# Altium PCB GEX_IDC.PcbDoc
Units mil, origin at the board's own origin, x right, y up, seen from the top; angles counter-clockwise.
Board outline 2677.17 x 1929.14 mil, 2 copper layers (Top Layer, Bottom Layer); 28 components, 62 nets, 198 pads, 115 vias.
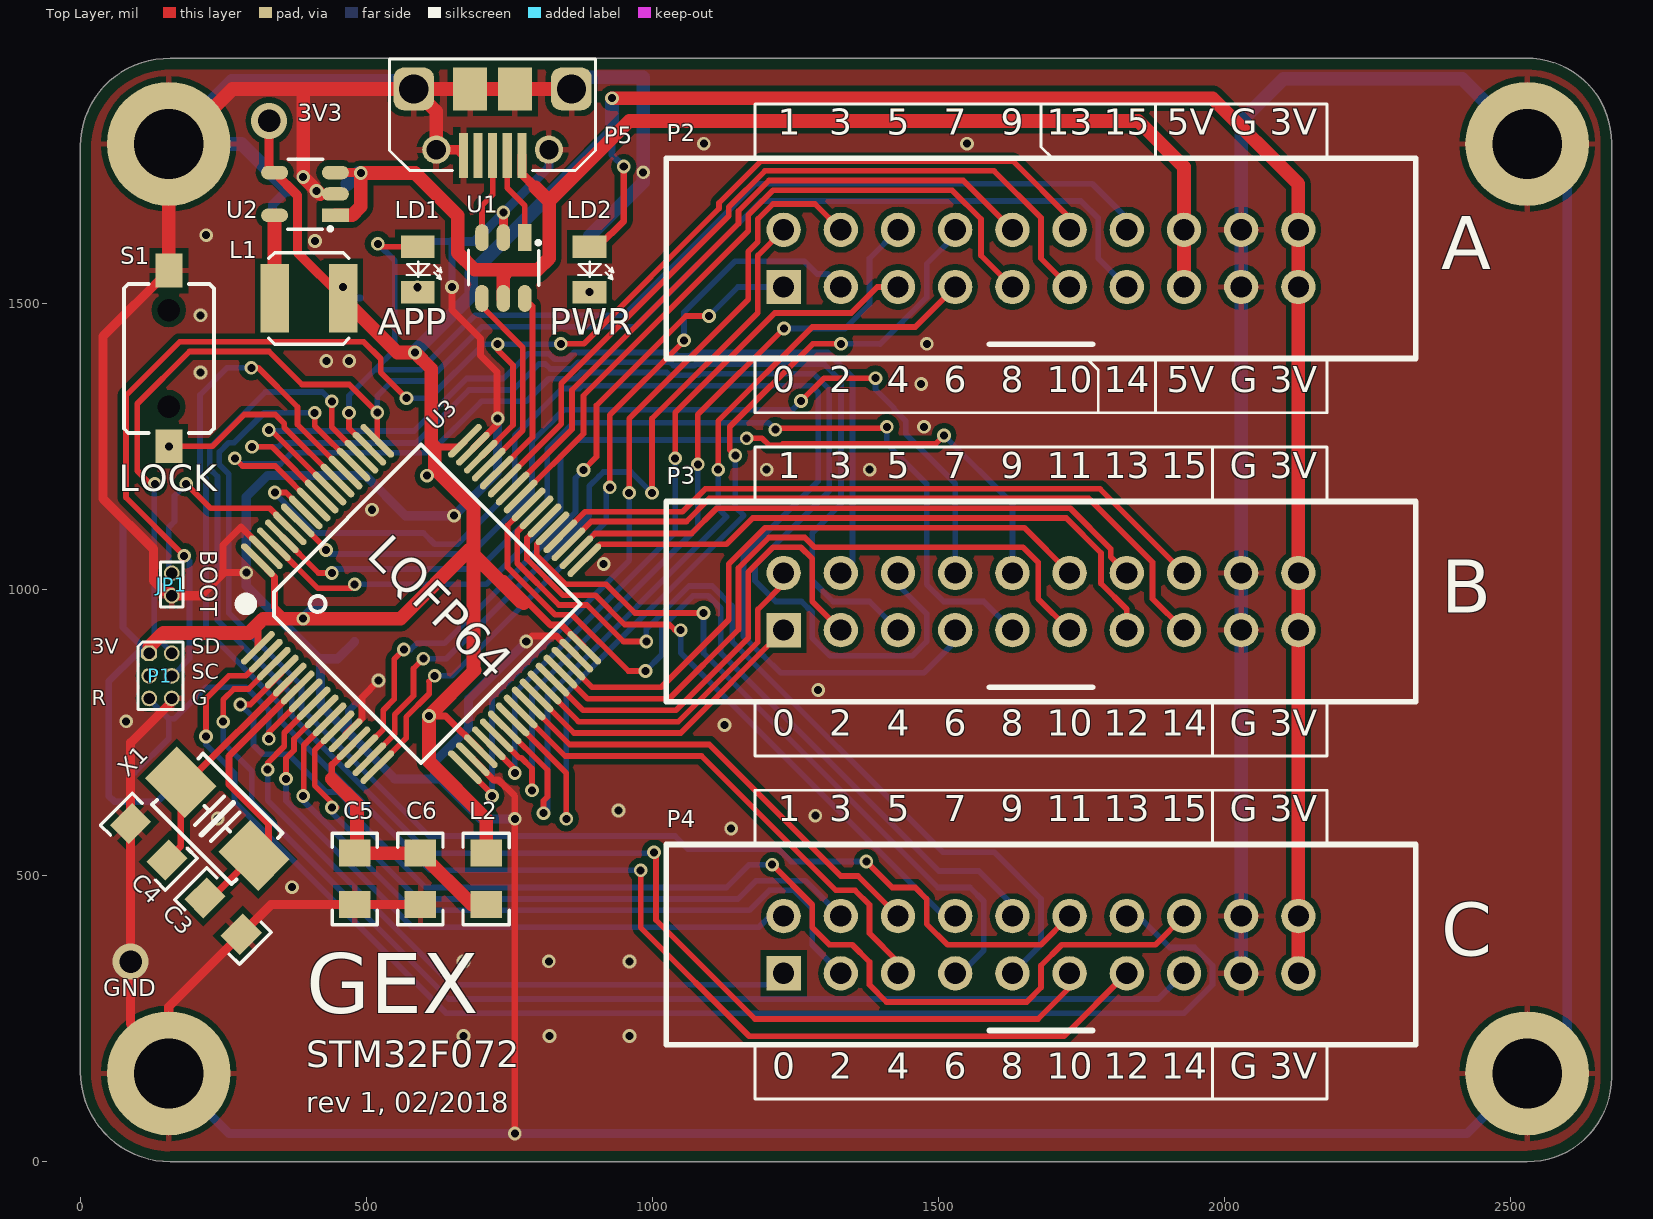
[diagram p0: Top Layer view]
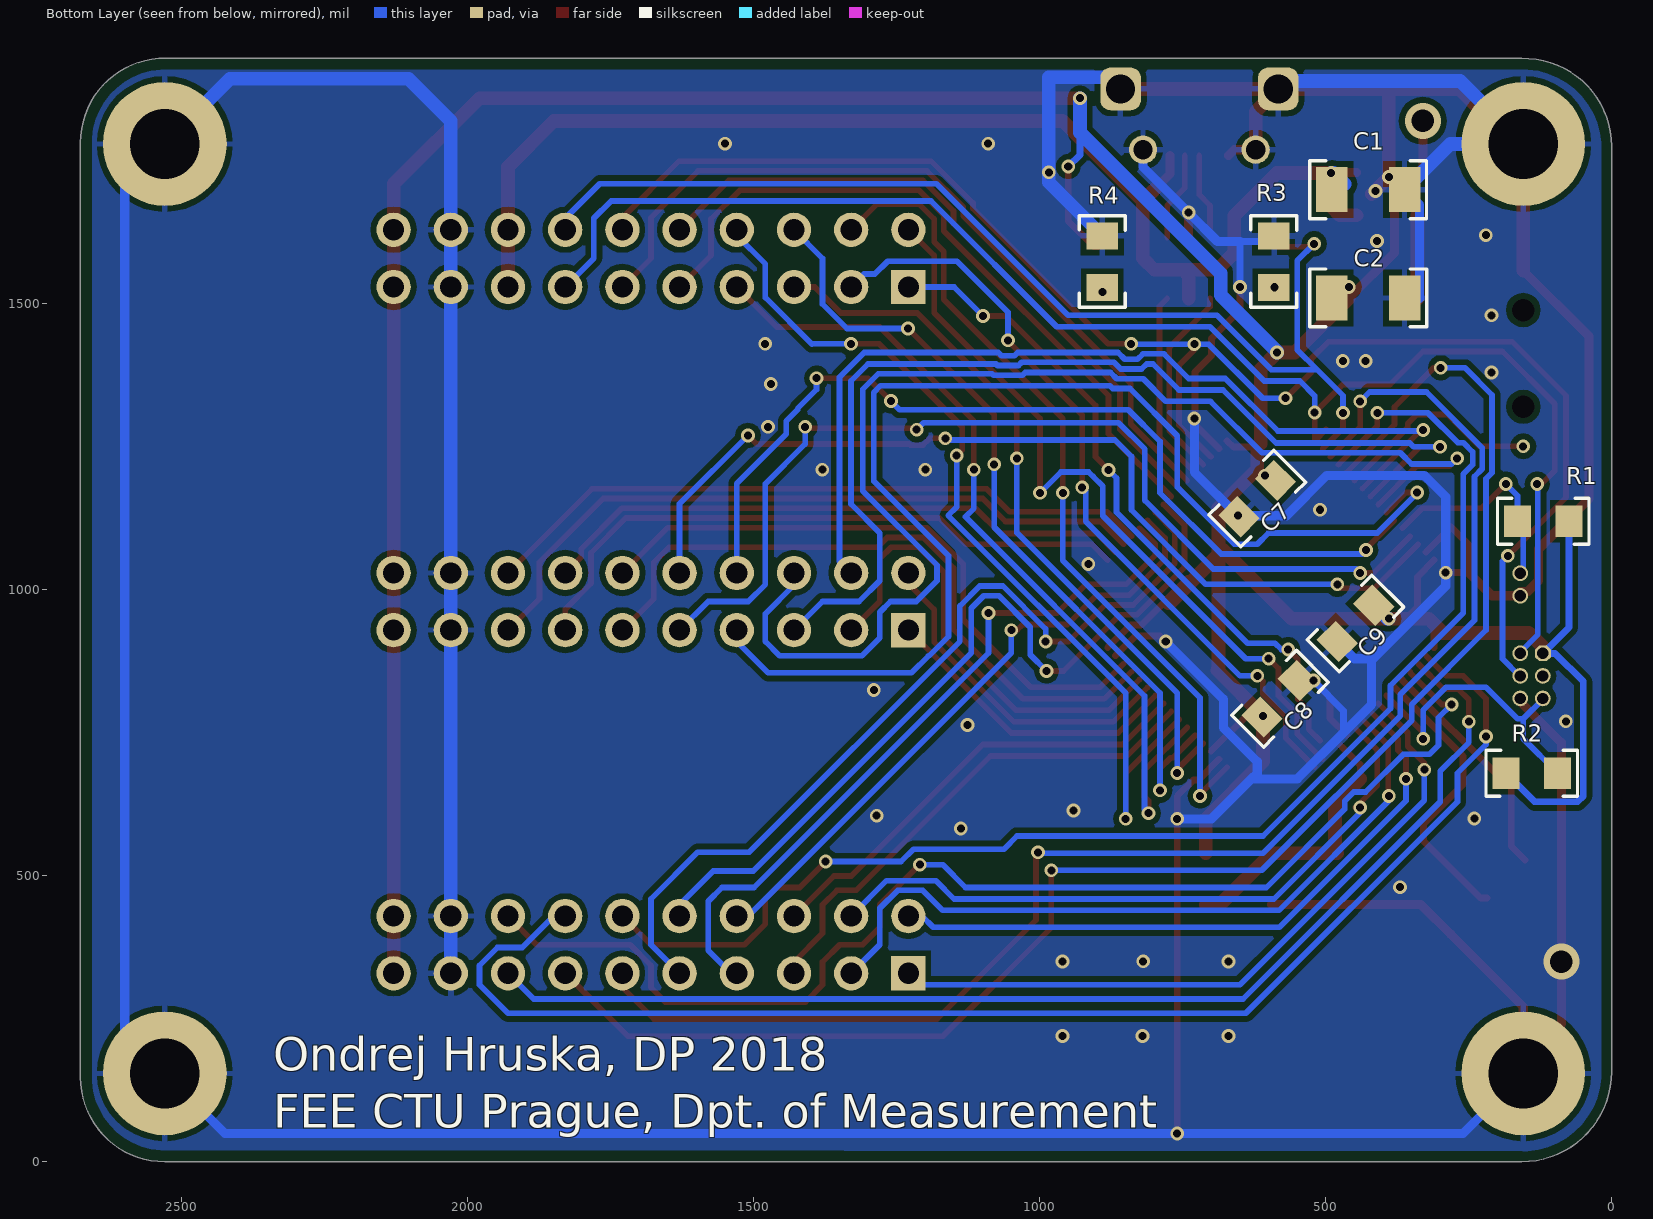
[diagram p1: Bottom Layer view, seen from below]

## Layer stack, top to bottom
Top Solder: solder mask 0.4, Solder Resist, Dk 3.5
Top Layer: signal copper 1.4
Dielectric 1: dielectric 12.6, FR-4, Dk 4.8
Bottom Layer: signal copper 1.4
Bottom Solder: solder mask 0.4, Solder Resist, Dk 3.5

## Board outline
0,1775.59 cw(c153.59,1775.59) 157.48,1929.13 2540.23,1929.14 cw(c2529.52,1781.89) 2677.16,1781.88 2677.17,147.64 cw(c2529.53,147.63) 2529.53,0 157.48,0 cw(c157.48,157.48) 0,157.48

## Design rules (kind name [scope] priority, off if disabled: settings)
Clearance [All] p1: gap=10 except(7: Track-Track Track-SMDPad SMDPad-SMDPad)
PolygonConnect PolygonConnect_GND [All vs InNet('GND') And IsVia] p1: connectstyle=Direct reliefconductorwidth=10 reliefentries=4 polygonreliefangle="90 Angle" airgapwidth=10
PolygonConnect [All] p2: connectstyle=Relief reliefconductorwidth=10 reliefentries=4 polygonreliefangle="90 Angle" airgapwidth=10
RoutingVias [All] p1: holewidth=14 width=24 viastyle="Through Hole" minholewidth=14 minwidth=24 maxholewidth=100 maxwidth=100
SolderMaskExpansion [All] p1: expansion=2
Width ThickSupply [(InNet('3V3') OR InNet('3V3A') OR InNet('5V'))] p1: maxlimit=40 minlimit=12 preferedwidth=40
Width [All] p2: maxlimit=100 minlimit=7 preferedwidth=10
30 further rules are at their usual default settings.

## Classes and differential pairs
component class GEX_Dongle: C1 C2 C3 C4 C5 C6 C7 C8 C9 L1 L2 LD1 P1 P2 P3 P4 P5 R1 R2 R3 S1 U1 U2 U3 X1

## Components (designator, comment, footprint, x,y, rotation, side; value= is the part's Value field where it differs from the comment)
C1 "4u7" C1206 425.78,1699.53 r0 bottom
C2 "4u7" C1206 425.72,1510.34 r0 bottom
C3 "12p" C0805 249.53,429.53 r135 top
C4 "12p" C0805 119.53,559.53 r315 top
C5 "1u" C0805 479.53,494.53 r90 top
C6 "100n" C0805 594.53,494.53 r90 top
C7 "100n" C0805 619.53,1159.53 r135 bottom
C8 "100n" C0805 579.53,809.53 r315 bottom
C9 "1u" C0805 447.71,941.35 r135 bottom
JP1 "BOOT" Header_2_1mm 159.53,1009.21 r270 top
L1 "4.7uH" L_3x3 399.53,1509.53 r0 top
L2 "BEAD" R0805 709.53,494.53 r270 top
LD1 "Red" LED_SMD 590,1560 r270 top
LD2 "Green" LED_SMD 890,1560 r270 top
P1 "PROG" Header_3x2_1mm 120.16,888.9 r0 top
P2 "Header 20" MLW20_GEX_14 1679.53,1579.53 r0 top locked
P3 "Header 20" MLW20_GEX_16 1679.53,979.53 r0 top locked
P4 "Header 20" MLW20_GEX_16 1679.53,379.53 r0 top locked
P5 "USB_Micro_TypeB_Molex_105017" USB_Micro-B_AFCI_10118194 720.71,1932.91 r180 top
R1 "100k" R0805 119.53,1119.53 r0 bottom
R2 "10k" R0805 139.53,679.53 r180 bottom
R3 "1k" R0805 590.5,1574 r270 bottom
R4 "1k" R0805 890.5,1574 r270 bottom
S1 "LOCK" BTN_AJ050 154.53,1404.53 r90 top
U1 "ESD" SOT23-6 776.93,1607.95 r270 top
U2 "MCP1603T-330I" SOT23-5 437.95,1654.72 r180 top
U3 "STM32F072RBT6" LQFP64 331.21,919.6 r45 top locked
X1 "8MHz" XTAL-SMD-50-32 239.53,599.53 r135 top

## Footprints (in the part's own frame and the unit in brackets; to place one, negate y for a bottom-side part, rotate by r counter-clockwise, add the part's x,y. Pads: shape width x height; smd on the part's side, far side on the other; paste and mask are expansions set on the pad)
BTN_AJ050 [mm]
  rect 1.5x1.2 smd: 1(-3.9,0) 2(3.9,0)
  rect 0x0 hole 1 unplated: ""(-2.15,0) ""(2.15,0)
  silkscreen extent -3.3,-2 3.3,2, body extent -3,-1.75 3,1.75, height 4
C0805 [mm]
  rect 1.2x1.4 smd: 1(-1.143,0) 2(1.143,0)
  silkscreen extent -2.03,-1 2.03,1, body extent -1,-0.63 1,0.63, height 0.5
C1206 [mm]
  rect 1.4x2 smd: 1(-1.619,0) 2(1.619,0)
  silkscreen extent -2.6,-1.28 2.6,1.28, body extent -1.6,-0.8 1.6,0.8, height 1
Header_2_1mm [mm]
  round 0.7 hole 0.5: 1(-0.5,0) 2(0.5,0)
  silkscreen extent -1,-0.5 1,0.5
Header_3x2_1mm [mm]
  oct 0.7x0.7 hole 0.5: 1(0,0)
  round 0.7 hole 0.5: 2(1,0) 3(0,-1) 4(1,-1) 5(0,-2) 6(1,-2)
  silkscreen extent -0.5,-2.5 1.5,0.5
L_3x3 [mil]
  rect 50x120 smd: 1(-60,0) 2(60,0)
  silkscreen extent -70,-80 70,80, body extent -60,-60 60,60, height 50
LED_SMD [mm]
  rect 1x1.5 smd: A(-1.016,0) C(1.016,0)
  silkscreen extent -0.36,-0.51 0.43,1.05, body extent -1.05,-0.45 1.02,0.45, height 0.85
LQFP64 [mm]
  oval 2x0.3 smd: 1(-0.75,0) 2(-0.75,-0.5) 3(-0.75,-1) 4(-0.75,-1.5) 5(-0.75,-2) 6(-0.75,-2.5) 7(-0.75,-3) 8(-0.75,-3.5) 9(-0.75,-4) 10(-0.75,-4.5) 11(-0.75,-5) 12(-0.75,-5.5) 13(-0.75,-6) 14(-0.75,-6.5) 15(-0.75,-7) 16(-0.75,-7.5) 33(12.25,-7.5) 34(12.25,-7) 35(12.25,-6.5) 36(12.25,-6) 37(12.25,-5.5) 38(12.25,-5) 39(12.25,-4.5) 40(12.25,-4) 41(12.25,-3.5) 42(12.25,-3) 43(12.25,-2.5) 44(12.25,-2) 45(12.25,-1.5) 46(12.25,-1) 47(12.25,-0.5) 48(12.25,0)
  oval 0.3x2 smd: 17(2,-10.25) 18(2.5,-10.25) 19(3,-10.25) 20(3.5,-10.25) 21(4,-10.25) 22(4.5,-10.25) 23(5,-10.25) 24(5.5,-10.25) 25(6,-10.25) 26(6.5,-10.25) 27(7,-10.25) 28(7.5,-10.25) 29(8,-10.25) 30(8.5,-10.25) 31(9,-10.25) 32(9.5,-10.25) 49(9.5,2.75) 50(9,2.75) 51(8.5,2.75) 52(8,2.75) 53(7.5,2.75) 54(7,2.75) 55(6.5,2.75) 56(6,2.75) 57(5.5,2.75) 58(5,2.75) 59(4.5,2.75) 60(4,2.75) 61(3.5,2.75) 62(3,2.75) 63(2.5,2.75) 64(2,2.75)
  silkscreen extent 0,-8.75 10.75,2, body extent 0.75,-8.75 10.75,1.25, height 1.6
MLW20_GEX_14 [mil] "Header, STRT 20WAY - MLW20"
  rect 60x60 hole 37: 1(-450,-50)
  round 60 hole 37: 2(-450,50) 3(-350,-50) 4(-350,50) 5(-250,-50) 6(-250,50) 7(-150,-50) 8(-150,50) 9(-50,-50) 10(-50,50) 11(50,-50) 12(50,50) 13(150,-50) 14(150,50) 15(250,-50) 16(250,50) 17(350,-50) 18(350,50) 19(450,-50) 20(450,50)
  silkscreen extent -655,-270 655,270
MLW20_GEX_16 [mil] "Header, STRT 20WAY - MLW20"
  rect 60x60 hole 37: 1(-450,-50)
  round 60 hole 37: 2(-450,50) 3(-350,-50) 4(-350,50) 5(-250,-50) 6(-250,50) 7(-150,-50) 8(-150,50) 9(-50,-50) 10(-50,50) 11(50,-50) 12(50,50) 13(150,-50) 14(150,50) 15(250,-50) 16(250,50) 17(350,-50) 18(350,50) 19(450,-50) 20(450,50)
  silkscreen extent -655,-270 655,270
R0805 [mm]
  rect 1.2x1.4 smd: 1(-1.143,0) 2(1.143,0)
  silkscreen extent -2.03,-1.03 2.03,1.02, body extent -1,-0.63 1,0.63, height 0.5
SOT23-5 [mm]
  rect 1.2x0.6 smd: 1(-0.2,0)
  oval 1.2x0.6 smd: 2(-0.2,-0.95) 3(-0.2,-1.9) 4(2.5,-1.9) 5(2.5,0)
  silkscreen extent -0.05,-2.5 1.92,0.67, body extent -0.24,-2.35 2.55,0.45, height 0.8
SOT23-6 [mm]
  rect 1.2x0.6 smd: 1(-0.2,0)
  oval 1.2x0.6 smd: 2(-0.2,-0.95) 3(-0.2,-1.9) 4(2.5,-1.9) 5(2.5,-0.95) 6(2.5,0)
  silkscreen extent -0.05,-2.5 1.92,0.68, body extent -0.24,-2.35 2.55,0.45, height 0.8
USB_Micro-B_AFCI_10118194 [mm]
  rect 0.4x2 smd: 1(-1.3,4.404) 2(-0.65,4.404) 3(0,4.404) 4(0.65,4.404) 5(1.3,4.404)
  rrect50% 1.8x1.9 hole 1.3: SH(-3.5,1.45) SH(3.5,1.45)
  round 1.25 hole 0.85: SH(-2.5,4.15) SH(2.5,4.15)
  rect 1.5x1.9 smd: SH(-1,1.45) SH(1,1.45)
  silkscreen extent -4.57,0.13 4.57,5.08, body extent -4.09,-1.17 4.11,4.26, height 2.73
XTAL-SMD-50-32 [mm]
  rect 2.5x2 smd: 1(-2.3,0) 2(2.3,0)
  silkscreen extent -2.5,-1.6 2.5,1.6, body extent -2.51,-1.6 2.51,1.6, height 1.2

## Part data
C1 C2 C3 C4 C5 C6 C7 C8 C9: library part C
JP1: library part JUMP
L1 L2: library part L, "Inductor"
LD1 LD2: library part LED
P1: library part "Header 3X2", "Header, 3-Pin, Dual row"
P2 P3 P4: "Header, 20-Pin"
P5: "Connector SMD USB Micro Type B bottom mount, (recommended if hand soldering)"
R1 R2 R3 R4: library part R
S1: library part SW-SPST, "Single-Pole, Single-Throw Switch"
U1: library part USBLC6_ESD
U2: library part MCP1603
X1: library part XTALL

## Free pads (board coordinates)
  round 216.54 hole 122.05 unplated paste+0: H1(154.53,1779.53) H2(2529.53,1779.53) H3(2529.53,154.53) H4(154.53,154.53)

## Via types
v1: diameter 24, hole 14, Top Layer to Bottom Layer, tented both sides, 112 vias
v2: diameter 62.99, hole 39.37, Top Layer to Bottom Layer, 2 vias
v3: diameter 24, hole 14, Top Layer to Bottom Layer, 1 vias

## Nets (pads, with @x,y where several pads share a name; then routed paths per layer and width w, separated by ;. In a path a pad name is that pad's centre, name@x,y a point inside that pad or via, vN(x,y) a via of type N, cw(c..) or ccw(c..) an arc to the next point about the centre after c; other vN are vias at no path point)
3V3: C2.2 C7.2 C8.2 C9.2 L1.2 L2.1 LD2.A P1.1 P2.19 P2.20 P3.19 P3.20 P4.19 P4.20 R1.1 R2.1 U2.4 U3.1 U3.19 U3.32 U3.48 U3.64 | length 7083.1
  Top Layer w12: U3.1 310.33,940.33 ; U3.64 339.53,1022.64 339.53,969.53 359.53,949.53 ; v1(609.53,779.53) 638.32,779.53 U3.19 ; 619.53,1249.53 661.14,1249.53 U3.48 ; 729.53,1019.53 741.28,1019.53 822.28,938.53 841.22,938.53 U3.32 ; LD2.A 905,1600 950,1645 v1(950,1740)
  Top Layer w16: v2(330,1820) 330,1739.06 U2.4 379.53,1689.53 379.53,1589.53 L1.2
  Top Layer w24: P1.1 120.16,900.13 144.71,924.68 294.68,924.68 310.33,940.33 319.53,949.53 359.53,949.53 v1(389.53,949.53) 559.53,949.53 679.53,1069.53 687.17,1061.89 ; L1.2 554.06,1415 v1(585,1415) 613.53,1386.47 613.53,1255.53 619.53,1249.53 619.53,1211.25 687.17,1143.61 687.17,1061.89 ; L2.1 709.53,599.53 609.53,699.53 v1(609.53,779.53) 689.53,859.53 687.17,861.89 687.17,1061.89 ; 775.28,977.04 771.16,981.16 769.53,979.53 729.53,1019.53 687.17,1061.89 ; v1(929.53,1859.53) 1979.53,1859.53 2129.53,1709.53 P2.20 P2.19 P3.20 P3.19 P4.20 P4.19
  Bottom Layer w12: R1.1 74.53,934.53 P1.1 98.9,888.9 49.53,839.53 49.53,639.53 59.53,629.53 134.53,629.53 R2.1 ; v1(459.53,1529.53) 478.71,1510.34 C2.2 ; 929.53,1799.53 929.53,1760.47 v1(950,1740)
  Bottom Layer w24: v1(389.53,949.53) 392.25,949.53 C9.2 ; v1(585,1415) 585,1416.92 683.53,1515.44 683.53,1553.53 929.53,1799.53 v1(929.53,1859.53)
  other v1: 605.89,1199.53
3V3A: C5.2 C6.2 L2.2 U3.13 | length 495.6
  Top Layer w12: 439.53,669.53 439.53,694.95 440.63,694.95 U3.13
  Top Layer w24: 439.53,669.53 483.53,625.53 483.53,543.53 C5.2 C6.2 684.53,449.53 L2.2
5V: C1.2 P2.15 P2.16 P5.1 U1.5 U2.1 U2.3 | length 2296.1
  Top Layer w16: U2.3 489.53,1729.53 v1(490.23,1728.83) ; P5.1 771.89,1727.17 795.71,1703.35
  Top Layer w24: U2.1 474.72,1654.72 490.23,1670.23 v1(490.23,1728.83) 585.17,1728.83 659.53,1654.47 659.53,1589.53 689.53,1559.53 749.53,1559.53 ; U1.5 739.53,1549.53 749.53,1559.53 ; 795.71,1703.35 819.53,1679.53 ; P2.15 P2.16 1929.53,1739.53 1849.53,1819.53 959.53,1819.53 819.53,1679.53 ; 749.53,1559.53 799.53,1559.53 819.53,1579.53 819.53,1679.53
  Bottom Layer w24: C1.2@467.03,1709.53 486.33,1728.83 v1(490.23,1728.83)
BOOT0: JP1.1 R1.2 U3.60 | length 388.7
  Top Layer w10: v1@180.39,1185 v1(185,1185) 227.47,1142.53 331,1142.53 U3.60
  Bottom Layer w10: JP1.1 154.34,1034.08 154.34,1109.34 R1.2 164.53,1164.53 v1(185,1185)
DM: U1.6 U3.44 | length 336.3
  Top Layer w10: U3.44@728.14,1204.73 790.53,1267.11 790.53,1495.93 U1.6
DP: U1.4 U3.45 | length 344.9
  Top Layer w10: U1.4 702.13,1495.11 773.53,1423.71 773.53,1278.4 U3.45
GND: C1.1 C2.1 C3.1 C4.1 C5.1 C6.1 C7.1 C8.1 C9.1 JP1.2 P1.6 P2.17 P2.18 P3.17 P3.18 P4.17 P4.18 P5.5 P5.SH pad.H1 pad.H2 pad.H3 pad.H4 R3.1 R4.1 S1.2 U1.2 U2.2 U3.12 U3.18 U3.31 U3.47 U3.63 | length 14850.7
  Top Layer w12: v1(290,1030) 249.53,1030 249.53,1078.57 280.48,1109.53 U3.63 ; U3.12 463.45,746.71 492.1,775.36 492.1,812.1 v1(521.35,841.35) ; v1(649.53,1529.53) 649.53,1489.53 699.53,1439.53 699.53,1409.53 728.53,1380.53 728.53,1300.53 v1(729.53,1299.53) 729.53,1289.53 686.71,1246.71 U3.47 ; U3.18 722.48,667.53 731.13,667.53 759.53,639.13 v1(759.53,599.53) v1(759.53,49.53) ; v1(779.53,909.53) 789.53,919.53 832.38,919.53 U3.31
  Top Layer w16: pad.H4 pad.H4@154.53,174.53 ; S1.2 39.53,1443.07 39.53,1159.53 127.75,1071.31 127.75,1015.73 146.36,997.12 159.53,997.12 JP1.2 209.06,989.53 249.53,1030 ; P1.6 159.53,804.58 87.71,732.76 C4.1 v2(87.71,350) 87.71,241.35 pad.H4@154.53,174.53 ; C6.1 C5.1 333.17,449.53 C3.1 154.53,270.89 pad.H4@154.53,174.53 ; P5.SH@622.28,1769.53 659.53,1769.53 P5.5 ; U1.2 v1(739.53,1659.53)
  Top Layer w24: S1.2 pad.H1 169.53,1779.53 265.83,1875.83 389.53,1875.83 ; v1@419.36,1692.13 v1(389.53,1721.95) 389.53,1875.83 ; P5.SH@622.28,1769.53 622.28,1836.46 P5.SH@582.91,1875.83 ; P5.SH@858.5,1875.83 760.08,1875.83 681.34,1875.83 P5.SH@582.91,1875.83 ; 389.53,1875.83 P5.SH@582.91,1875.83
  Bottom Layer w12: 468.45,750.61 468.45,788.45 v1(521.35,841.35) ; R3.1@589.03,1609.03 649.53,1609.03 v1(649.53,1529.53)
  Bottom Layer w16: pad.H4 259.53,49.53 v1(759.53,49.53) 2424.53,49.53 pad.H3 2599.53,224.53 2599.53,1709.53 pad.H2 ; C2.1@335.78,1509.53 335.78,1673.28 C1.1 ; C9.1 449.53,879.53 419.53,879.53 ; 649.53,1609.03 689.03,1609.03 v1(739.53,1659.53) 819.13,1739.13 P5.SH@819.13,1769.53 ; v1(729.53,1299.53) 729.53,1205.89 v1(653.17,1129.53) 568.46,1129.53 497.99,1200 327.57,1200 290,1162.43 v1(290,1030) 290,1006.63 417.1,879.53 419.53,879.53 ; v1(759.53,599.53) 699.53,599.53 629.53,669.53 ; v1(779.53,909.53) 678.79,808.79 678.79,758.79 619.53,699.53 619.53,679.53 629.53,669.53 ; 419.53,879.53 419.53,799.53 468.45,750.61 549.53,669.53 629.53,669.53
  Bottom Layer w24: C1.1 282.03,1779.53 pad.H1 264.53,1889.53 569.21,1889.53 P5.SH@582.91,1875.83 ; P5.SH@858.5,1875.83 878.68,1896 984,1896 v1(984,1730) 984,1712.5 R4.1 ; P4.17 P4.18 P3.17 P3.18 P2.17 P2.18 2029.53,1819.53 2103.53,1893.53 2415.53,1893.53 pad.H2
  other v1: 670,220 820,220 960,220 670,350 960,350 818.9,350.39 370,480 1137.8,582.68 240,600 1285,605 940.94,614.17 1125.98,763.78 80,770 1290,825 915,1045 510,1140 1200,1210 1380,1210 1475,1285 1470,1360 210,1380 430,1400 470,1400 1480,1430 210,1480 410,1610 220,1620 412.77,1697.13 1090,1780 1550,1780
LED: LD1.A P2.14 U3.50 | length 1984.7
  Top Layer w10: v1(469.53,1309.53) 469.53,1282.38 U3.50 ; v1(520,1605) 525,1600 LD1.A
  Bottom Layer w10: v1(469.53,1309.53) 469.53,1339.53 515,1385 ; v1(520,1605) 549.47,1575.53 549.47,1419.47 515,1385 ; P2.14 1829.53,1649.53 1769.06,1710 1180.47,1710 950.47,1480 690,1480 595,1385 515,1385
LOCK: S1.1 U3.54 | length 369.8
  Top Layer w10: v1(154.53,1250.98) 230.98,1250.98 286.53,1306.53 340.71,1306.53 356.53,1290.71 356.53,1284.03 U3.54
NetL1_1: L1.1 U2.5 | length 145.2
  Top Layer w24: L1.1 U2.5
NetLD1_C: LD1.C R3.2 | length 10
  Bottom Layer w10: R3.2@589.03,1519.03 v1(589.03,1529.03)
NetLD2_C: LD2.C R4.2 | length 9.2
  Top Layer w12: LD2.C v3(890.5,1520.5)
  Bottom Layer w12: v3(890.5,1520.5) R4.2
NetP5_2: P5.2 U1.1 | length 156.4
  Top Layer w10: P5.2 746.3,1702.76 776.93,1672.13 U1.1
NetP5_3: P5.3 U1.3 | length 151.4
  Top Layer w10: U1.3 702.13,1672.13 720.71,1690.71 P5.3
NRST: P1.5 R2.2 U3.7 | length 536.4
  Top Layer w10: v1(329.53,739.53) 329.53,750.88 U3.7
  Bottom Layer w10: R2.2 154.53,739.53 154.53,774.46 ; P1.5 120.16,808.83 154.53,774.46 ; v1(329.53,739.53) 329.53,789.53 289.53,829.53 219.6,829.53 164.53,774.46 154.53,774.46
OSC_IN: C4.2 U3.5 X1.2 | length 411.3
  Top Layer w12: C4.2 175.5,551.86 X1.2 187.09,663.56 366.29,842.76 U3.5
OSC_OUT: C3.2 U3.6 X1.1 | length 499.2
  Top Layer w12: C3.2 229.41,461.35 X1.1 328.56,560.5 328.56,590.5 259.53,659.53 259.53,709.13 379.53,829.12 U3.6
PA0: P2.1 U3.14 | length 1197.2
  Top Layer w10: U3.14@509.53,736.01 529.53,756.01 529.53,789.53 548.53,808.53 548.53,878.53 v1(565.53,895.53) ; v1(879.53,1209.53) 902.53,1232.53 902.53,1322.53 1058.92,1478.92 v1(1098.92,1478.92)
  Bottom Layer w10: v1(565.53,895.53) 577.34,895.53 588.34,906.53 636.53,906.53 865.53,1135.53 865.53,1195.53 v1(879.53,1209.53) ; v1(1098.92,1478.92) 1149.53,1529.53 P2.1
PA1: P2.2 U3.15 | length 1350.8
  Top Layer w10: U3.15 549.53,748.17 549.53,781.75 582.53,814.75 582.53,862.53 v1(599.53,879.53) ; v1(999.53,1169.53) 999.53,1299.53 1184.53,1484.53 1184.53,1584.53 P2.2
  Bottom Layer w10: v1(599.53,879.53) 639.53,879.53 889.53,1129.53 889.53,1181.34 906.53,1198.34 914.34,1206.16 962.89,1206.16 v1(999.53,1169.53)
PA2: P2.3 U3.16 | length 1371.4
  Top Layer w10: U3.16 569.53,740.33 569.53,777.71 609.96,818.14 609.96,839.1 609.53,839.53 v1(619.53,849.53) ; v1@919.53,1179.53 919.89,1179.16 v1(925.53,1179.16) 925.53,1305.53 1055.29,1435.29 v1(1055.29,1436.28)
  Bottom Layer w10: v1(619.53,849.53) 649.53,849.53 919.53,1119.53 919.53,1173.16 v1(925.53,1179.16) ; v1(1055.29,1436.28) 1055.29,1485.29 1144.53,1574.53 1265.74,1574.53 1288.24,1552.03 1307.03,1552.03 P2.3
PA3: P2.4 U3.17 | length 1445.8
  Top Layer w10: U3.17 719.53,642.64 v1(719.53,639.53) ; v1(959.53,1169.53) 959.53,1299.53 1167.53,1507.53 1167.53,1591.57 1184.53,1608.57 1184.53,1648.17 1210.89,1674.53 1284.53,1674.53 P2.4
  Bottom Layer w10: v1(719.53,639.53) 719.53,811.34 959.53,1051.34 v1(959.53,1169.53)
PA4: P2.5 U3.20 | length 1298.1
  Top Layer w10: U3.20 759.53,686.16 v1(759.53,679.53) ; v1(1040,1230) 1040,1310 1214,1484 1347.64,1484 1393.17,1529.53 P2.5
  Bottom Layer w10: v1(759.53,679.53) 759.53,819.53 1040,1100 v1(1040,1230)
PA5: P2.6 U3.21 | length 1431.6
  Top Layer w10: U3.21 767,706.53 770.71,706.53 789.53,687.71 v1(789.53,649.53) ; v1(1079.53,1219.53) 1079.53,1306.53 v1(1230,1457)
  Bottom Layer w10: v1(789.53,649.53) 789.53,819.53 1079.53,1109.53 v1(1079.53,1219.53) ; v1(1230,1457) 1337,1457 1379.53,1499.53 1379.53,1579.53 P2.6
PA6: P2.7 U3.22 | length 1519.5
  Top Layer w10: U3.22 816.53,684.84 816.53,638.34 809.53,631.34 v1(809.53,609.53) ; v1(1115,1210) 1115,1295 1279.53,1459.53 1459.53,1459.53 P2.7
  Bottom Layer w10: v1(809.53,609.53) 816.53,616.53 816.53,814.61 1129.53,1127.61 1115,1142.14 v1(1115,1210)
PA7: P2.8 U3.23 | length 1614.4
  Top Layer w10: U3.23 849.53,679.67 v1(849.53,599.53) ; v1(1145,1235) 1135.47,1244.53 1135.47,1285 1280.47,1430 v1(1330,1430)
  Bottom Layer w10: v1(849.53,599.53) 849.53,819.53 1160,1130 1145,1145 v1(1145,1235) ; v1(1330,1430) 1397.69,1430 1398.17,1429.53 1479.53,1510.89 1479.53,1569.53 1529.53,1619.53 P2.8
PA8: P2.9 U3.41 | length 1244
  Top Layer w10: U3.41 879.53,1273.04 879.53,1339.53 1167.53,1627.53 1167.53,1655.21 1210.85,1698.53 1524.17,1698.53 1574.53,1648.17 1574.53,1584.53 P2.9
PA9: P2.10 U3.42 | length 1185.4
  Top Layer w10: U3.42 859.53,1280.88 859.53,1349.53 1150.53,1640.53 1150.53,1662.25 1203.8,1715.53 1543.53,1715.53 P2.10
PA10: P2.11 U3.43 | length 1388.3
  Top Layer w10: U3.43 840.71,1289.91 840.71,1360.71 1133.53,1653.53 1133.53,1669.29 1196.76,1732.53 1597.47,1732.53 1679.53,1650.47 1679.53,1579.53 P2.11
PA13: P1.4 P2.12 U3.46 | length 2765
  Top Layer w10: v1(181.34,1059.53) 79.53,1161.34 79.53,1339.53 173.53,1433.53 495.53,1433.53 525,1404.06 525,1380 v1(570,1335) ; U3.46 700.97,1232.79 756.53,1288.34 756.53,1392.53 729.53,1419.53 v1(729.53,1429.53) ; v1(840,1430) 880,1430 1116.53,1666.53 1116.53,1676.33 1189.72,1749.53 1630.47,1749.53 1729.53,1650.47 P2.12
  Bottom Layer w10: P1.4 160.86,849.53 190.86,879.53 190.86,1050.01 v1(181.34,1059.53) ; v1(570,1335) 610,1335 704.53,1429.53 v1(729.53,1429.53) 839.53,1429.53 v1(840,1430)
PA14: P1.2 P2.13 U3.49 | length 2629.2
  Top Layer w10: v1(130,1185) 122.81,1185 99.53,1208.28 99.53,1325.49 190.57,1416.53 330,1416.53 387.47,1359.06 470,1359.06 v1(519.12,1309.93) U3.49 U3.49@499.53,1280.22
  Bottom Layer w10: v1(130,1185) 128.91,1183.91 128.91,922.03 159.53,891.41 P1.2 ; v1(519.12,1309.93) 519.12,1339.12 545,1365 607.23,1365 702.23,1460 970,1460 1190,1680 1749.06,1680 1779.53,1649.53 1779.53,1579.53 P2.13
PB0: P3.1 U3.26 | length 533.8
  Top Layer w10: U3.26 863.19,749.53 1049.53,749.53 P3.1
PB1: P3.2 U3.27 | length 595
  Top Layer w10: U3.27 871.03,769.53 1045.49,769.53 1184.53,908.57 1184.53,965.74 1229.53,1010.74 P3.2
PB2: P3.3 U3.28 | length 816.1
  Top Layer w10: U3.28 878.87,789.53 1041.44,789.53 1167.53,915.61 1167.53,1031.17 1210.89,1074.53 1259.53,1074.53 1279.53,1054.53 1279.53,979.53 P3.3
PB3: P3.4 U3.55 | length 1609.2
  Top Layer w10: v1(329.53,1279.53) 333.19,1279.53 U3.55
  Bottom Layer w10: v1(329.53,1279.53) 329.53,1277.55 583.51,1277.55 675.49,1369.53 739.53,1369.53 782.53,1412.53 819.29,1412.53 828.82,1403 851.18,1403 863.18,1415 1038.39,1415 1044.11,1409.28 1066.48,1409.28 1072.2,1415 1306.82,1415 1350,1371.82 1350,1050 P3.4
PB4: P3.5 U3.56 | length 1829.4
  Top Layer w10: v1(300,1250) 334.88,1250 U3.56
  Bottom Layer w10: v1(300,1250) 300,1249.08 300.92,1250 346.47,1250 353.01,1256.54 586.54,1256.54 679.53,1349.53 756.53,1349.53 802,1395 812.77,1395 821.77,1386 858.23,1386 870.23,1398 1031.35,1398 1037.07,1392.28 1073.52,1392.28 1076.24,1395 1300,1395 1330,1365 1330,1150 1279.53,1099.53 1279.53,1015.89 1315.89,979.53 1379.53,979.53 P3.5
PB5: P3.6 U3.57 | length 2215.8
  Top Layer w10: v1(270,1230) 283.47,1216.53 340.51,1216.53 U3.57
  Bottom Layer w10: v1(270,1230) 280,1220 350,1220 369.54,1239.54 611.35,1239.54 701.34,1329.53 779.53,1329.53 819,1369 865.27,1369 876.27,1380 1025.3,1380 1030.03,1375.28 1080.56,1375.28 1083.28,1378 1282,1378 1309.53,1350.47 1309.53,1173.17 1179.53,1043.17 1179.53,1015.89 1215.89,979.53 1260.74,979.53 1279.53,960.74 1279.53,915.89 1310.89,884.53 1454.53,884.53 1479.53,909.53 1479.53,958.17 1429.53,1008.17 P3.6
PB6: P3.7 U3.58 | length 2149.7
  Top Layer w10: v1(340,1170) 359.2,1170 U3.58
  Bottom Layer w10: v1(340,1170) 339.06,1170 409.73,1099.33 599.73,1099.33 619.54,1079.52 659.52,1079.52 759.53,1179.53 759.53,1269.53 842,1352 872.31,1352 877.31,1357 1278,1357 1290,1345 1290,1190 1159.53,1059.53 1159.53,918.31 1193.31,884.53 1194.53,884.53 1224.06,855 1475,855 1529.53,909.53 P3.7
PB7: P3.8 U3.59 | length 1614.2
  Top Layer w10: U3.59 429.53,1071.84 v1(429.53,1069.53) ; v1(1260,1330) 1300,1370 v1(1390,1370)
  Bottom Layer w10: v1(429.53,1069.53) 436.54,1062.52 682.52,1062.52 789.53,1169.53 789.53,1259.53 845,1315 1245,1315 v1(1260,1330) ; v1(1390,1370) 1390,1350 1423.18,1316.82 1423.18,1315 1443,1295.18 1443,1272.42 1529.53,1185.89 P3.8
PB8: P3.9 U3.61 | length 1740.3
  Top Layer w10: U3.61 416.16,1029.53 v1(439.53,1029.53) ; v1(1215,1280) 1217.53,1282.53 1407.53,1282.53 v1(1410,1285)
  Bottom Layer w10: v1(439.53,1029.53) 446.53,1036.53 696.53,1036.53 816.01,1156.01 816.01,1246.01 862,1292 1203,1292 v1(1215,1280) ; v1(1410,1285) 1410,1255 1479.53,1185.47 1479.53,1009.53 1509.53,979.53 1579.53,979.53 P3.9
PB9: P3.10 U3.62 | length 1672.7
  Top Layer w10: U3.62 415.32,1002.53 472.53,1002.53 v1(479.53,1009.53) ; v1(1165,1265) 1191.82,1265 1203.82,1253 1226.18,1253 1228.18,1255 1495,1255 v1(1510,1270)
  Bottom Layer w10: v1(479.53,1009.53) 709.53,1009.53 839.53,1139.53 839.53,1233.04 868.48,1262 1166.18,1262 1165,1263.18 v1(1165,1265) ; v1(1510,1270) 1629.53,1150.47 P3.10
PB10: P3.11 U3.29 | length 1194.2
  Top Layer w10: U3.29 886.71,809.53 1029.53,809.53 1150.53,930.53 1150.53,1038.21 1203.85,1091.53 1266.57,1091.53 1283.57,1074.53 1648.17,1074.53 1674.53,1048.17 1674.53,984.53 P3.11
PB11: P3.12 U3.30 | length 1099
  Top Layer w10: U3.30 894.55,829.53 1015.49,829.53 1133.53,947.57 1133.53,1045.25 1196.8,1108.53 1650.53,1108.53 P3.12
PB12: P3.13 U3.33 | length 1112.9
  Top Layer w10: U3.33 908.72,1079.53 1129.53,1079.53 1175.53,1125.53 1723.53,1125.53 1784.53,1064.53 1784.53,1010.89 1829.53,965.89 P3.13
PB13: P3.14 U3.34 | length 1049.2
  Top Layer w10: U3.34 899.88,1098.53 1068.53,1098.53 1112.53,1142.53 1730.57,1142.53 1801.53,1071.57 1801.53,1057.53 P3.14
PB14: P3.15 U3.35 | length 1242
  Top Layer w10: U3.35 893.04,1119.53 1059.53,1119.53 1099.53,1159.53 1763.17,1159.53 1874.53,1048.17 1874.53,984.53 P3.15
PB15: P3.16 U3.36 | length 1185.5
  Top Layer w10: U3.36 882.21,1136.53 1052.49,1136.53 1092.49,1176.53 1782.53,1176.53 P3.16
PC0: P4.1 U3.8 | length 1246.7
  Top Layer w10: v1(327.44,685.53) 327.44,697.44 356.53,726.53 356.53,750.04 U3.8
  Bottom Layer w10: v1(327.44,685.53) 327.44,631.61 649.53,309.53 1209.53,309.53 P4.1
PC1: P4.2 U3.9 | length 1151.5
  Top Layer w10: v1(359.53,669.53) 359.53,705.49 373.53,719.49 373.53,739.21 U3.9
  Bottom Layer w10: v1(359.53,669.53) 359.53,631.34 580.87,410 1185.96,410 1205.49,429.53 P4.2
PC2: P4.3 U3.10 | length 1292.5
  Top Layer w10: v1(389.53,639.53) 390.53,640.53 390.53,728.37 U3.10
  Bottom Layer w10: v1(389.53,639.53) 389.53,631.34 581.34,439.53 1169.53,439.53 1204.53,474.53 1248.17,474.53 1279.53,443.17 1279.53,379.53 P4.3
PC3: P4.4 U3.11 | length 1181.1
  Top Layer w10: v1(439.53,619.53) 447.71,619.53 409.53,657.71 409.53,719.53 U3.11
  Bottom Layer w10: v1(439.53,619.53) 439.53,610.47 590.47,459.53 1149.53,459.53 1181.53,491.53 1267.53,491.53 P4.4
PC4: P4.5 U3.24 | length 890.5
  Top Layer w10: U3.24 847.51,709.53 1085.89,709.53 1320.89,474.53 1354.53,474.53 1379.53,449.53 1379.53,399.53 1429.53,349.53 P4.5
PC5: P4.6 U3.25 | length 799.9
  Top Layer w10: U3.25 855.35,729.53 1099.53,729.53 1329.53,499.53 1359.53,499.53 P4.6
PC6: P4.7 U3.37 | length 1284.3
  Top Layer w10: U3.37 797.7,1079.86 797.7,1060.69 848.86,1009.53 919.53,1009.53 969.53,959.53 v1(1089.53,959.53)
  Bottom Layer w10: v1(1089.53,959.53) 1089.53,889.53 1499.53,479.53 1555.49,479.53 1579.53,455.49 1579.53,369.53 1539.53,329.53 P4.7
PC7: P4.8 U3.38 | length 1111.3
  Top Layer w10: U3.38 780.7,1090.7 780.7,1053.65 843.82,990.53 900.53,990.53 951.53,939.53 1029.53,939.53 1039.53,929.53 v1(1049.53,929.53)
  Bottom Layer w10: v1(1049.53,929.53) 1049.53,889.53 1509.53,429.53 P4.8
PC8: P4.9 U3.39 | length 1542.3
  Top Layer w10: U3.39 763.7,1101.54 763.7,1046.61 836.78,973.53 885.53,973.53 949.53,909.53 v1(989.53,909.53)
  Bottom Layer w10: v1(989.53,909.53) 989.53,931.75 1064.3,1006.53 1104.75,1006.53 1139.53,971.75 1139.53,909.53 1507.71,541.35 1597.71,541.35 1679.53,459.53 1679.53,379.53 P4.9
PC9: P4.10 U3.40 | length 1455.2
  Top Layer w10: U3.40 746.7,1112.38 746.7,1039.56 829.74,956.53 859.53,956.53 958.06,858 v1(988,858)
  Bottom Layer w10: v1(988,858) 1016.53,886.53 1016.53,934.71 1071.34,989.53 1097.71,989.53 1119.53,967.71 1119.53,889.53 1500.71,508.35 1570.71,508.35 1629.53,449.53 P4.10
PC10: P4.11 U3.51 | length 2611.4
  Top Layer w10: v1(439.53,1329.53) 439.53,1284.55 U3.51 ; v1(1003,541) 1006.53,537.47 1006.53,422.53 1179.53,249.53 1674.53,249.53 1729.53,304.53 P4.11
  Bottom Layer w10: v1(439.53,1329.53) 423.07,1345.98 323.76,1345.98 226,1248.23 226,1211.77 239.53,1198.25 239.53,946.82 369.53,816.82 369.53,779.53 609.53,539.53 997.71,539.53 1003,534.24 v1(1003,541)
PC11: P4.12 U3.52 | length 2382.2
  Top Layer w10: v1(409.53,1309.53) 409.53,1286.71 U3.52 ; v1(1374.06,525) 1419.53,479.53 1459.53,479.53 1479.53,459.53 1479.53,415.89 1515.89,379.53 1679.53,379.53 P4.12
  Bottom Layer w10: v1(409.53,1309.53) 321.75,1309.53 321.55,1309.73 268.82,1257 258.82,1257 243,1241.18 243,1218.82 259.53,1202.29 259.53,959.53 386.53,832.53 386.53,792.53 609.53,569.53 1039.53,569.53 1062.53,546.53 1220.71,546.53 1242.24,525 v1(1374.06,525)
PC12: P4.13 U3.53 | length 2808
  Top Layer w10: v1(298.8,1388.11) 310.94,1388.11 379.53,1319.53 379.53,1288.87 U3.53 ; v1(979.53,509.53) 979.53,409.53 1169.53,219.53 1719.53,219.53 P4.13
  Bottom Layer w10: v1(298.8,1388.11) 256.3,1388.11 209,1340.82 209,1204.73 219.53,1194.21 219.53,929.53 349.53,799.53 349.53,771.75 611.75,509.53 v1(979.53,509.53)
PC13: P4.14 U3.2 | length 2440.1
  Top Layer w10: v1(219.64,743.5) 219.64,809.42 219.53,809.53 259.53,849.53 288.98,849.53 U3.2
  Bottom Layer w10: v1(219.64,743.5) 219.64,729.64 219.53,729.53 269.53,679.53 269.53,629.53 639.53,259.53 1929.53,259.53 1979.53,309.53 1979.53,343.17 1948.17,374.53 1904.53,374.53 1849.53,429.53 P4.14
PC14: P4.15 U3.3 | length 2105.2
  Top Layer w10: v1(249.53,769.53) 249.53,807.71 268.34,826.53 293.82,826.53 U3.3
  Bottom Layer w10: v1(249.53,769.53) 249.53,733.06 299.53,683.06 299.53,629.53 644.53,284.53 1884.53,284.53 P4.15
PC15: P4.16 U3.4 | length 2164.4
  Top Layer w10: v1(279.53,799.53) 297.04,799.53 352.09,854.58 U3.4 ; v1(1209.53,519.53) 1279.53,449.53 1279.53,409.53 1309.53,379.53 1349.53,379.53 1379.53,349.53 1379.53,309.53 1409.53,279.53 1654.53,279.53 1679.53,304.53 1679.53,343.17 1715.89,379.53 1879.53,379.53 P4.16
  Bottom Layer w10: v1(279.53,799.53) 302.53,776.53 302.53,728.34 318.34,712.53 364.03,712.53 430.03,646.53 450.71,646.53 466.53,630.71 466.53,616.57 603.57,479.53 1129.53,479.53 1169.53,519.53 v1(1209.53,519.53)
pads on no net: P1.3 P5.4 S1.

## Polygon pours and split planes (outlines as drawn)
GND on Top Layer "GND_TOP" (solid, remove dead copper, pour order 0): 19.34,1772.51 19.34,169.4 19.37,155.39 ccw(c156.28,155.39) 156.28,18.49 2529.53,19.69 ccw(c2529.22,147.94) 2657.48,148.25 2657.48,1781.5 ccw(c2529.53,1781.5) 2529.53,1909.45 156.28,1909.45 ccw(c156.28,1772.51)
GND on Bottom Layer "GND_BOT" (solid, remove dead copper, pour order 2): 18.43,1772.63 18.43,169.53 18.47,155.52 ccw(c155.38,155.52) 155.38,18.62 2528.62,19.81 ccw(c2528.31,148.07) 2656.57,148.38 2656.57,1781.63 ccw(c2528.62,1781.63) 2528.62,1909.58 155.38,1909.58 ccw(c155.38,1772.63)

## Silkscreen, mask and mechanical layers (free items; w line width, h text height)
Top Overlay:
  text "3V3" at 380,1810 h50
  text "A" at 2379.53,1529.53 h160
  text "APP" at 520,1430 h80
  text "PWR" at 820,1430 h80
  text "B" at 2379.53,929.53 h160
  text "3V /  / R" at 19.53,789.53 h45
  text "SD / SC / G" at 194.53,789.53 h45
  text "C" at 2379.53,329.53 h160
  text "GND" at 40,280 h50
  text "GEX" at 394.53,224.53 h180
  text "STM32F072" at 394.53,149.53 h80
  text "rev 1, 02/2018" at 394.53,74.53 h60
Bottom Overlay:
  text "Ondrej Hruska, DP 2018 / FEE CTU Prague, Dpt. of Measurement" at 2340,40 h100
Mechanical 1:
  lines w5: 0,1778.04 0,157.48 cw(c0,157.48) 0,157.47 ; 0.03,1778.04 cw(c154.96,1775) 158,1929.93 ; 150,1930 2530,1930 cw(c2528.58,1781.42) 2677.17,1780 2677.17,137.8 ; 2530,0 ccw(c2530.17,147.04) 2677,155 ; 2539.37,0 157.48,0 ; 0.01,157.45 ccw(c157.47,157.45) 157.47,-0.01 ccw(c157.47,0) 157.48,0 ; 0,157.47 ccw(c0.03,157.47) 0.01,157.45 ; 157.48,0 ccw(c157.48,0) 157.48,0

## Text inside footprints (layer, text, board x,y; h text height)
P2: Top Overlay "5V" at 1899.53,1779.53 h78.74; Top Overlay "0" at 1209.53,1329.53 h78.74; Top Overlay "1" at 1219.53,1779.53 h78.74; Top Overlay "2" at 1309.53,1329.53 h78.74; Top Overlay "4" at 1409.53,1329.53 h78.74; Top Overlay "6" at 1509.53,1329.53 h78.74; Top Overlay "8" at 1609.53,1329.53 h78.74; Top Overlay "10" at 1689.53,1329.53 h78.74; Top Overlay "14" at 1789.53,1329.53 h78.74; Top Overlay "5V" at 1899.53,1329.53 h78.74; Top Overlay "3" at 1309.53,1779.53 h78.74; Top Overlay "5" at 1409.53,1779.53 h78.74; Top Overlay "7" at 1509.53,1779.53 h78.74; Top Overlay "9" at 1609.53,1779.53 h78.74; Top Overlay "13" at 1689.53,1779.53 h78.74; Top Overlay "15" at 1789.53,1779.53 h78.74; Top Overlay "3V" at 2079.53,1329.53 h78.74; Top Overlay "G" at 2009.53,1329.53 h78.74; Top Overlay "G" at 2009.53,1779.53 h78.74; Top Overlay "3V" at 2079.53,1779.53 h78.74
P3: Top Overlay "0" at 1209.53,729.53 h78.74; Top Overlay "1" at 1219.53,1179.53 h78.74; Top Overlay "2" at 1309.53,729.53 h78.74; Top Overlay "4" at 1409.53,729.53 h78.74; Top Overlay "6" at 1509.53,729.53 h78.74; Top Overlay "8" at 1609.53,729.53 h78.74; Top Overlay "10" at 1689.53,729.53 h78.74; Top Overlay "12" at 1789.53,729.53 h78.74; Top Overlay "14" at 1889.53,729.53 h78.74; Top Overlay "3" at 1309.53,1179.53 h78.74; Top Overlay "5" at 1409.53,1179.53 h78.74; Top Overlay "7" at 1509.53,1179.53 h78.74; Top Overlay "9" at 1609.53,1179.53 h78.74; Top Overlay "11" at 1689.53,1179.53 h78.74; Top Overlay "13" at 1789.53,1179.53 h78.74; Top Overlay "15" at 1889.53,1179.53 h78.74; Top Overlay "3V" at 2079.53,729.53 h78.74; Top Overlay "G" at 2009.53,729.53 h78.74; Top Overlay "G" at 2009.53,1179.53 h78.74; Top Overlay "3V" at 2079.53,1179.53 h78.74
P4: Top Overlay "0" at 1209.53,129.53 h78.74; Top Overlay "1" at 1219.53,579.53 h78.74; Top Overlay "2" at 1309.53,129.53 h78.74; Top Overlay "4" at 1409.53,129.53 h78.74; Top Overlay "6" at 1509.53,129.53 h78.74; Top Overlay "8" at 1609.53,129.53 h78.74; Top Overlay "10" at 1689.53,129.53 h78.74; Top Overlay "12" at 1789.53,129.53 h78.74; Top Overlay "14" at 1889.53,129.53 h78.74; Top Overlay "3" at 1309.53,579.53 h78.74; Top Overlay "5" at 1409.53,579.53 h78.74; Top Overlay "7" at 1509.53,579.53 h78.74; Top Overlay "9" at 1609.53,579.53 h78.74; Top Overlay "11" at 1689.53,579.53 h78.74; Top Overlay "13" at 1789.53,579.53 h78.74; Top Overlay "15" at 1889.53,579.53 h78.74; Top Overlay "3V" at 2079.53,129.53 h78.74; Top Overlay "G" at 2009.53,129.53 h78.74; Top Overlay "G" at 2009.53,579.53 h78.74; Top Overlay "3V" at 2079.53,579.53 h78.74
U3: Top Overlay "LQFP64" at 484.33,1044.88 h102.36 r315